# EAGLE board AIS_Mk2.2 (EAGLE 6.4)
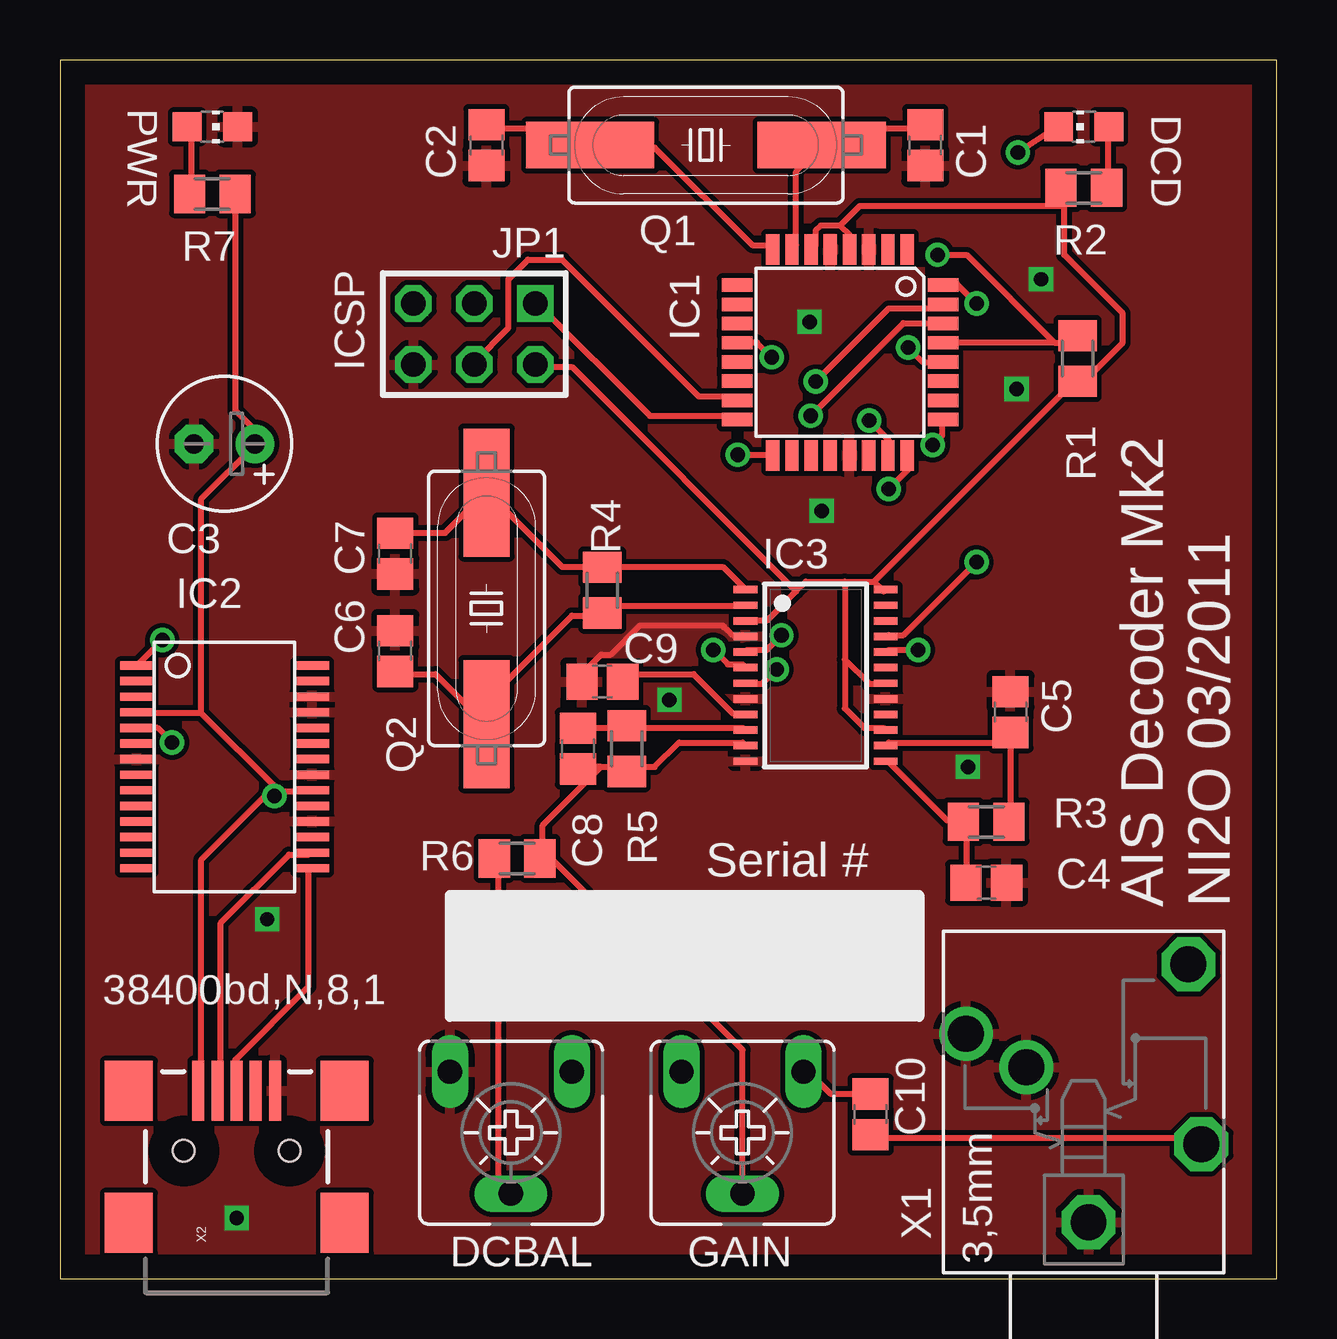
[diagram p0: board, top side]
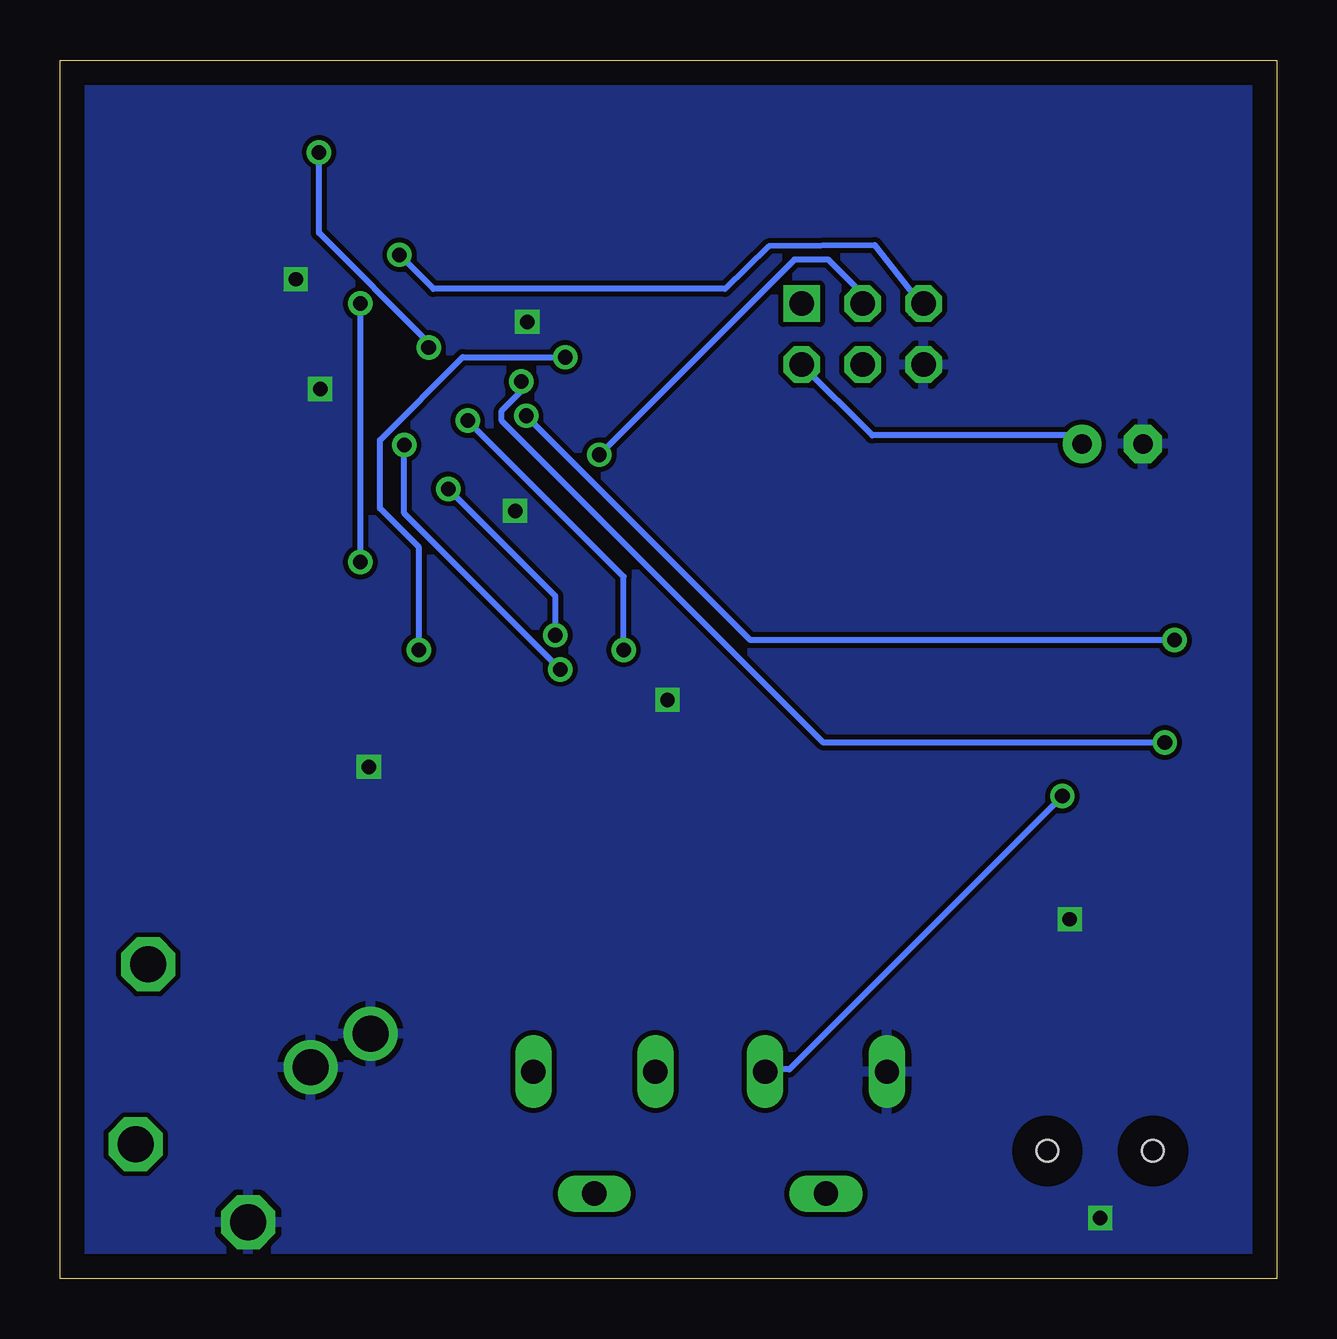
[diagram p1: board, bottom side, seen from below]

Size 50.72 x 50.79 mm. Coordinates in mm from the lower left corner, seen from the top.
Outline: 0,0 50.72,0 50.72,50.79 0,50.79 0,0
Copper layers (1*16): Top 0.035mm / dielectric 1.5mm / Bottom 0.035mm
Design rules "default": minimum track width 10mil, minimum drill 24mil, track to track 8mil, track to pad 8mil, pad to pad 8mil, via to via 8mil, smd to smd 8mil, copper to edge 40mil, drill to drill 8mil, minimum pad ring 10mil, minimum via ring 8mil, stop-mask expansion 4mil, vias tented up to drill 0mil, thermal gap 10mil

## Footprints (pad centres in the part's own frame; a part is rotated, then mirrored left to right if it is on the bottom)
C0805 = smd 1.3 x 1.5: 1 -0.85,0; 2 0.85,0
E2,5-6 = drill 0.813 pad 1.6: + -1.27,0 | drill 0.813 pad 1.6 octagon: - 1.27,0
CA6V = drill 1.016 long: A -2.54,-2.54; E 2.54,-2.54; S 0,2.54
TQFP32-08 = smd 1.27 x 0.559: 1 -4.293,2.8; 2 -4.293,2; 3 -4.293,1.2; 4 -4.293,0.4; 5 -4.293,-0.4; 6 -4.293,-1.2; 7 -4.293,-2; 8 -4.293,-2.8; 17 4.293,-2.8; 18 4.293,-2; 19 4.293,-1.2; 20 4.293,-0.4; 21 4.293,0.4; 22 4.293,1.2; 23 4.293,2; 24 4.293,2.8 | smd 0.559 x 1.27: 9 -2.8,-4.293; 10 -2,-4.293; 11 -1.2,-4.293; 12 -0.4,-4.293; 13 0.4,-4.293; 14 1.2,-4.293; 15 2,-4.293; 16 2.8,-4.293; 25 2.8,4.293; 26 2,4.293; 27 1.2,4.293; 28 0.4,4.293; 29 -0.4,4.293; 30 -1.2,4.293; 31 -2,4.293; 32 -2.8,4.293
SSOP28DB = smd 0.348 x 1.397: 1 -4.225,-3.656; 2 -3.575,-3.656; 3 -2.925,-3.656; 4 -2.275,-3.656; 5 -1.625,-3.656; 6 -0.975,-3.656; 7 -0.325,-3.656; 8 0.325,-3.656; 9 0.975,-3.656; 10 1.625,-3.656; 11 2.275,-3.656; 12 2.925,-3.656; 13 3.575,-3.656; 14 4.225,-3.656; 15 4.225,3.656; 16 3.575,3.656; 17 2.925,3.656; 18 2.275,3.656; 19 1.625,3.656; 20 0.975,3.656; 21 0.325,3.656; 22 -0.325,3.656; 23 -0.975,3.656; 24 -1.625,3.656; 25 -2.275,3.656; 26 -2.925,3.656; 27 -3.575,3.656; 28 -4.225,3.656
TSSOP24 = smd 0.305 x 0.991: 1 -3.575,-2.918; 2 -2.925,-2.918; 3 -2.275,-2.918; 4 -1.625,-2.918; 5 -0.975,-2.918; 6 -0.325,-2.918; 7 0.325,-2.918; 8 0.975,-2.918; 9 1.625,-2.918; 10 2.275,-2.918; 11 2.925,-2.918; 12 3.575,-2.918; 13 3.575,2.918; 14 2.925,2.918; 15 2.275,2.918; 16 1.625,2.918; 17 0.975,2.918; 18 0.325,2.918; 19 -0.325,2.918; 20 -0.975,2.918; 21 -1.625,2.918; 22 -2.275,2.918; 23 -2.925,2.918; 24 -3.575,2.918
AVR-ISP-6 = drill 1.016 square: 1 -2.54,-1.27 | drill 1.016 octagon: 2 -2.54,1.27; 3 0,-1.27; 4 0,1.27; 5 2.54,-1.27; 6 2.54,1.27
CHIP-LED0805 = smd 1.2 x 1.2: A 0,-1.05; C 0,1.05
HC49UP = smd 5.334 x 1.93: 1 -4.826,0; 2 4.826,0
M0805 = smd 1.3 x 1.6: 1 -0.95,0; 2 0.95,0
PG203J = drill 1.499 octagon: 1 -5.004,-0.203; 4 5.74,-4.369; 5 -1.753,-4.902 | drill 1.499: 2 2.845,4.902; 3 1.448,2.388
USB-MINIB = smd 2.5 x 0.5: D+ 2.5,0; D- 2.5,0.8; GND 2.5,-1.6; ID 2.5,-0.8; VBUS 2.5,1.6 | smd 2.5 x 2: GND@1 -3,-4.5; GND@2 -3,4.5; GND@3 2.5,4.5; GND@4 2.5,-4.5 | hole 0.9: 0,2.2; 0,-2.2

## Placement (x,y rotation side)
C1  33pF  [C0805]  36.07,47.24 270 top
C2  33pF  [C0805]  17.78,47.24 270 top
C3  1uF  [E2,5-6]  6.86,34.8 180 top
C4  15nF  [C0805]  38.61,16.51 0 top
C5  15nF  [C0805]  39.62,23.62 90 top
C6  22pF  [C0805]  13.97,26.16 90 top
C7  22pF  [C0805]  13.97,30.23 270 top
C8  22pF  [C0805]  21.59,22.1 270 top
C9  10nF  [C0805]  22.61,24.89 180 top
C10  10nF  [C0805]  33.78,6.86 90 top
DCBAL  100K  [CA6V]  18.8,6.1 180 top
GAIN  100K  [CA6V]  28.45,6.1 180 top
IC1  MEGA8-AI  [TQFP32-08]  32.51,38.61 270 top
IC2  FT232RL-BASICSSOP  [SSOP28DB]  6.86,21.34 270 top
IC3  CMX589AE2  [TSSOP24]  31.5,25.15 270 top
JP1  AVR-ISP-6  [AVR-ISP-6]  17.27,39.37 180 top
LED1  DATA  [CHIP-LED0805]  42.67,48.01 90 top
LED2  PWR  [CHIP-LED0805]  6.35,48.01 270 top
Q1  8MHz  [HC49UP]  26.92,47.24 0 top
Q2  4.9152MHz  [HC49UP]  17.78,27.94 270 top
R1  10K  [M0805]  42.42,38.35 270 top
R2  470R  [M0805]  42.67,45.47 180 top
R3  1M  [M0805]  38.61,19.05 0 top
R4  1M  [M0805]  22.61,28.7 270 top
R5  100K  [M0805]  23.62,22.1 90 top
R6  270K  [M0805]  19.05,17.53 0 top
R7  1K  [M0805]  6.35,45.21 180 top
X1  PG203J  [PG203J]  42.67,7.37 90 top
X2  USBSMD  [USB-MINIB]  7.37,5.33 90 top

## Library data of the parts
C1-C10 R1-R7 = resistor
DCBAL GAIN = pot
IC1 JP1 = atmel
IC2 X2 = SparkFun
IC3 = cml-micro
LED1 LED2 = led
Q1 Q2 = crystal
X1 = con-hirschmann

## Nets
+5V: C3.+ DCBAL.A IC1.4 IC1.6 IC2.4 IC2.20 IC3.3 IC3.15 IC3.18 IC3.24 JP1.2 R1.2 R2.2 R7.1 X2.VBUS
AVCC: IC1.18
DCBAL: DCBAL.S R6.1
GND: C1.2 C2.2 C3.- C4.2 C5.2 C6.2 C7.2 C9.2 DCBAL.E IC1.3 IC1.5 IC1.21 IC2.7 IC2.18 IC2.21 IC2.25 IC2.26 IC3.4 IC3.8 IC3.12 IC3.17 JP1.6 LED2.C X1.1 X1.2 X1.3 X2.GND
N$1: C2.1 IC1.8 Q1.1
N$2: C1.1 IC1.7 Q1.2
N$3: IC1.17 JP1.3
N$4: IC1.16 JP1.1
N$6: IC1.29 JP1.5 R1.1
N$7: C4.1 IC3.13 R3.1
N$8: IC1.28 LED1.C
N$9: LED1.A R2.1
N$10: C5.1 IC3.14 R3.2
N$11: IC1.30 IC2.1
N$12: IC1.31 IC2.5
N$13: C7.1 IC3.1 Q2.1 R4.1
N$14: C6.1 IC3.2 Q2.2 R4.2
N$15: C8.1 IC3.10 R5.2
N$16: C10.2 GAIN.A
N$17: C10.1 X1.5
N$18: C9.1 IC3.9
N$19: IC1.32 IC3.21
N$20: IC1.12 IC3.20
N$21: IC1.24 IC3.5
N$22: IC1.23 IC3.6
N$23: IC1.25 IC3.7
N$24: LED2.A R7.2
N$25: IC1.15 JP1.4
SIG: C8.2 GAIN.S IC3.11 R5.1 R6.2
USB+: IC2.15 X2.D+
USB-: IC2.16 X2.D-

## Tracks (layer width: path | path; a pad name or v marks a point on that pad's centre or on a via)
+5V  (via drill 0.61)
  Top 0.254: 32.51,43.89 31.7,43.89 31.5,43.69 31.5,43.08 IC1.6 | 32.51,43.89 32.92,43.48 32.92,43.08 IC1.4 | 30.68,28.65 31.09,29.06 32.72,29.06 | 30.68,28.65 29.46,27.43 28.65,27.43 IC3.3 | 32.72,29.06 33.93,29.06 | 33.93,29.06 34.34,28.65 IC3.24 | 32.72,29.06 32.72,25.81 | 32.72,25.81 32.72,23.77 33.53,22.96 34.34,22.96 IC3.15 | 32.72,25.81 33.73,24.79 34.34,24.79 IC3.18 | 33.93,29.06 42.27,37.39 R1.2 42.47,37.59 42.88,37.59 44.3,39.01 44.3,40.23 41.86,42.67 41.86,44.7 | 41.86,44.7 41.86,45.31 R2.2 41.86,44.7 | 32.51,43.89 33.33,44.7 41.86,44.7 | 30.68,28.65 21.34,38 19.91,38 JP1.2 | R7.1 7.32,45.11 7.32,36.17 8.13,35.36 C3.+ 8.13,34.75 5.89,32.51 5.89,23.57 | 5.89,23.57 3.25,23.57 IC2.4 | 8.94,20.52 9.14,20.32 10.36,20.32 IC2.20 | 8.94,20.52 5.89,23.57 | 8.74,20.32 8.94,20.52 | 8.74,20.32 5.89,17.48 5.89,7.92 X2.VBUS | 8.74,20.32 v8.94,20.12
  Bottom 0.254: v8.94,20.12 20.32,8.74 21.34,8.74 DCBAL.A | JP1.2 16.87,35.15 8.33,35.15 8.13,34.95 C3.+
DCBAL
  Top 0.254: R6.1 18.29,17.48 18.29,4.06 DCBAL.S
GND  (via drill 0.6)
  Top 0.254: IC3.4 28.45,26.82 28.04,26.82 27.84,27.03 27.68,27.13 27.64,27.23 24.18,27.23 22.96,26.01 22.55,26.01 21.95,25.4 21.95,24.99 C9.2
  other vias: 40.89,41.66 31.75,32 31.24,39.88 37.85,21.34 8.64,14.99 25.4,24.13 39.88,37.08 7.37,2.54
  pour Bottom: 0,0 0,50.8 50.8,50.8 50.8,0
  pour Top: 0,0 0,50.8 50.8,50.8 50.8,0
N$1
  Top 0.254: IC1.8 29.67,43.08 28.85,43.08 24.79,47.14 22.15,47.14 Q1.1 21.95,47.35 21.34,47.95 17.88,47.95 C2.1
N$2
  Top 0.254: IC1.7 30.68,43.08 30.68,46.13 31.7,47.14 Q1.2 31.9,47.35 32.51,47.95 35.97,47.95 C1.1
N$3  (via drill 0.61)
  Top 0.254: v28.25,34.34 29.67,34.34 IC1.17
  Bottom 0.254: v28.25,34.34 20.12,42.47 18.69,42.47 17.27,41.05 JP1.3
N$4
  Top 0.254: IC1.16 28.04,35.97 24.59,35.97 19.91,40.64 JP1.1
N$6  (via drill 0.6)
  Top 0.254: 41.45,39.01 42.06,39.01 42.27,39.22 R1.1 | 41.45,39.01 36.98,39.01 IC1.29 | v36.58,42.67 37.8,42.67 41.45,39.01 | JP1.5 v14.83,40.64
  Bottom 0.254: v14.83,40.64 16.76,43.08 21.18,43.03 23.01,41.25 35.15,41.25 v36.58,42.67
N$7
  Top 0.254: IC3.13 34.54,21.54 36.98,19.1 37.59,19.1 R3.1 37.8,18.9 37.8,16.66 C4.1
N$8  (via drill 0.61)
  Top 0.254: v39.93,46.94 41.45,47.95 LED1.C | v35.36,38.81 35.97,38.2 36.78,38.2 IC1.28
  Bottom 0.254: v39.93,46.94 39.93,43.59 35.36,39.01 v35.36,38.81
N$9
  Top 0.254: LED1.A 43.69,47.95 43.69,45.52 R2.1
N$10
  Top 0.254: 39.62,22.76 39.22,22.35 34.54,22.35 IC3.14 | 39.62,22.76 39.62,19.1 R3.2 | 39.62,22.76 C5.1
N$11  (via drill 0.61)
  Top 0.254: v31.29,35.97 35.15,39.83 36.78,39.83 IC1.30 | v4.27,26.62 3.25,25.6 IC2.1
  Bottom 0.254: v31.29,35.97 21.95,26.62 v4.27,26.62
N$12  (via drill 0.61)
  Top 0.254: v31.5,37.39 34.54,40.44 36.78,40.44 IC1.31 | v4.67,22.35 4.06,22.96 3.25,22.96 IC2.5
  Bottom 0.254: v31.5,37.39 31.5,36.98 32.31,36.17 32.31,35.76 18.9,22.35 v4.67,22.35
N$13
  Top 0.254: IC3.1 28.45,28.85 27.64,29.67 22.76,29.67 R4.1 22.55,29.67 20.93,29.67 17.88,32.72 Q2.1 17.68,32.72 16.05,31.09 14.02,31.09 C7.1
N$14
  Top 0.254: IC3.2 28.45,28.04 22.96,28.04 22.76,27.84 R4.2 22.55,27.64 21.34,27.64 17.27,23.57 | 17.27,23.57 17.68,23.16 Q2.2 17.27,23.57 | 17.27,23.57 15.65,25.2 14.02,25.2 C6.1
N$15
  Top 0.254: IC3.10 28.45,22.96 23.77,22.96 R5.2 23.57,22.96 21.74,22.96 C8.1
N$16
  Top 0.254: C10.2 33.73,7.72 32.11,7.72 31.09,8.74 GAIN.A
N$17
  Top 0.254: C10.1 33.93,5.89 47.35,5.89 47.55,5.69 X1.5
N$18
  Top 0.254: IC3.9 28.45,23.57 28.04,23.57 26.42,25.2 23.77,25.2 23.57,24.99 C9.1
N$19  (via drill 0.61)
  Top 0.254: v38.2,29.87 35.15,26.82 34.54,26.82 IC3.21 | v38.2,40.64 37.39,41.45 36.98,41.45 IC1.32
  Bottom 0.254: v38.2,29.87 v38.2,40.64
N$20  (via drill 0.61)
  Top 0.254: v35.76,26.21 34.54,26.21 IC3.20 | v29.67,38.41 29.06,39.01 28.25,39.01 IC1.12
  Bottom 0.254: v35.76,26.21 35.76,30.48 37.39,32.11 37.39,34.95 33.93,38.41 v29.67,38.41
N$21  (via drill 0.61)
  Top 0.254: v30.07,26.82 29.46,26.21 28.65,26.21 IC3.5 | v34.54,32.92 35.36,33.73 35.36,34.14 IC1.24
  Bottom 0.254: v30.07,26.82 30.07,28.45 v34.54,32.92
N$22  (via drill 0.61)
  Top 0.254: v27.23,26.21 27.84,25.6 28.45,25.6 IC3.6 | v33.73,35.76 34.54,34.95 34.54,34.34 IC1.23
  Bottom 0.254: v27.23,26.21 27.23,29.26 v33.73,35.76
N$23  (via drill 0.61)
  Top 0.254: v29.87,25.4 29.26,24.79 28.65,24.79 IC3.7 | v36.37,34.75 36.78,35.15 36.78,35.76 IC1.25
  Bottom 0.254: v29.87,25.4 36.37,31.9 v36.37,34.75
N$24
  Top 0.254: LED2.A 5.49,47.95 5.49,45.31 R7.2
N$25
  Top 0.254: IC1.15 28.04,36.78 26.62,36.78 20.93,42.47 19.51,42.47 18.69,41.66 18.69,39.62 17.27,38.2 JP1.4
SIG
  Top 0.254: IC3.11 28.45,22.35 25.81,22.35 24.79,21.34 23.77,21.34 R5.1 23.57,21.34 22.55,21.34 | 22.55,21.34 21.74,21.34 C8.2 | 20.12,17.88 20.12,18.9 22.55,21.34 | 20.12,17.88 20.12,17.68 R6.2 20.12,17.88 | 20.12,17.88 28.45,9.55 GAIN.S
USB+
  Top 0.254: IC2.15 10.36,17.07 10.36,12.19 7.32,9.14 7.32,7.92 X2.D+
USB-
  Top 0.254: IC2.16 10.36,17.68 9.55,17.68 6.71,14.83 6.71,7.92 X2.D-

## Text on the board
tPlace: PWR | DCD | ICSP | Serial # | AIS Decoder Mk2 | NI2O 03/2011 | 38400bd,N,8,1 | DCBAL | GAIN